# Altium PCB Omid Mazarei.PcbDoc (part 3 of 3)
Units mm, origin at the board's own origin, x right, y up, seen from the top; angles counter-clockwise.
Board outline 297 x 210 mm, 2 copper layers (Top Layer, Bottom Layer); 469 components, 0 nets, 938 pads, 2 vias.
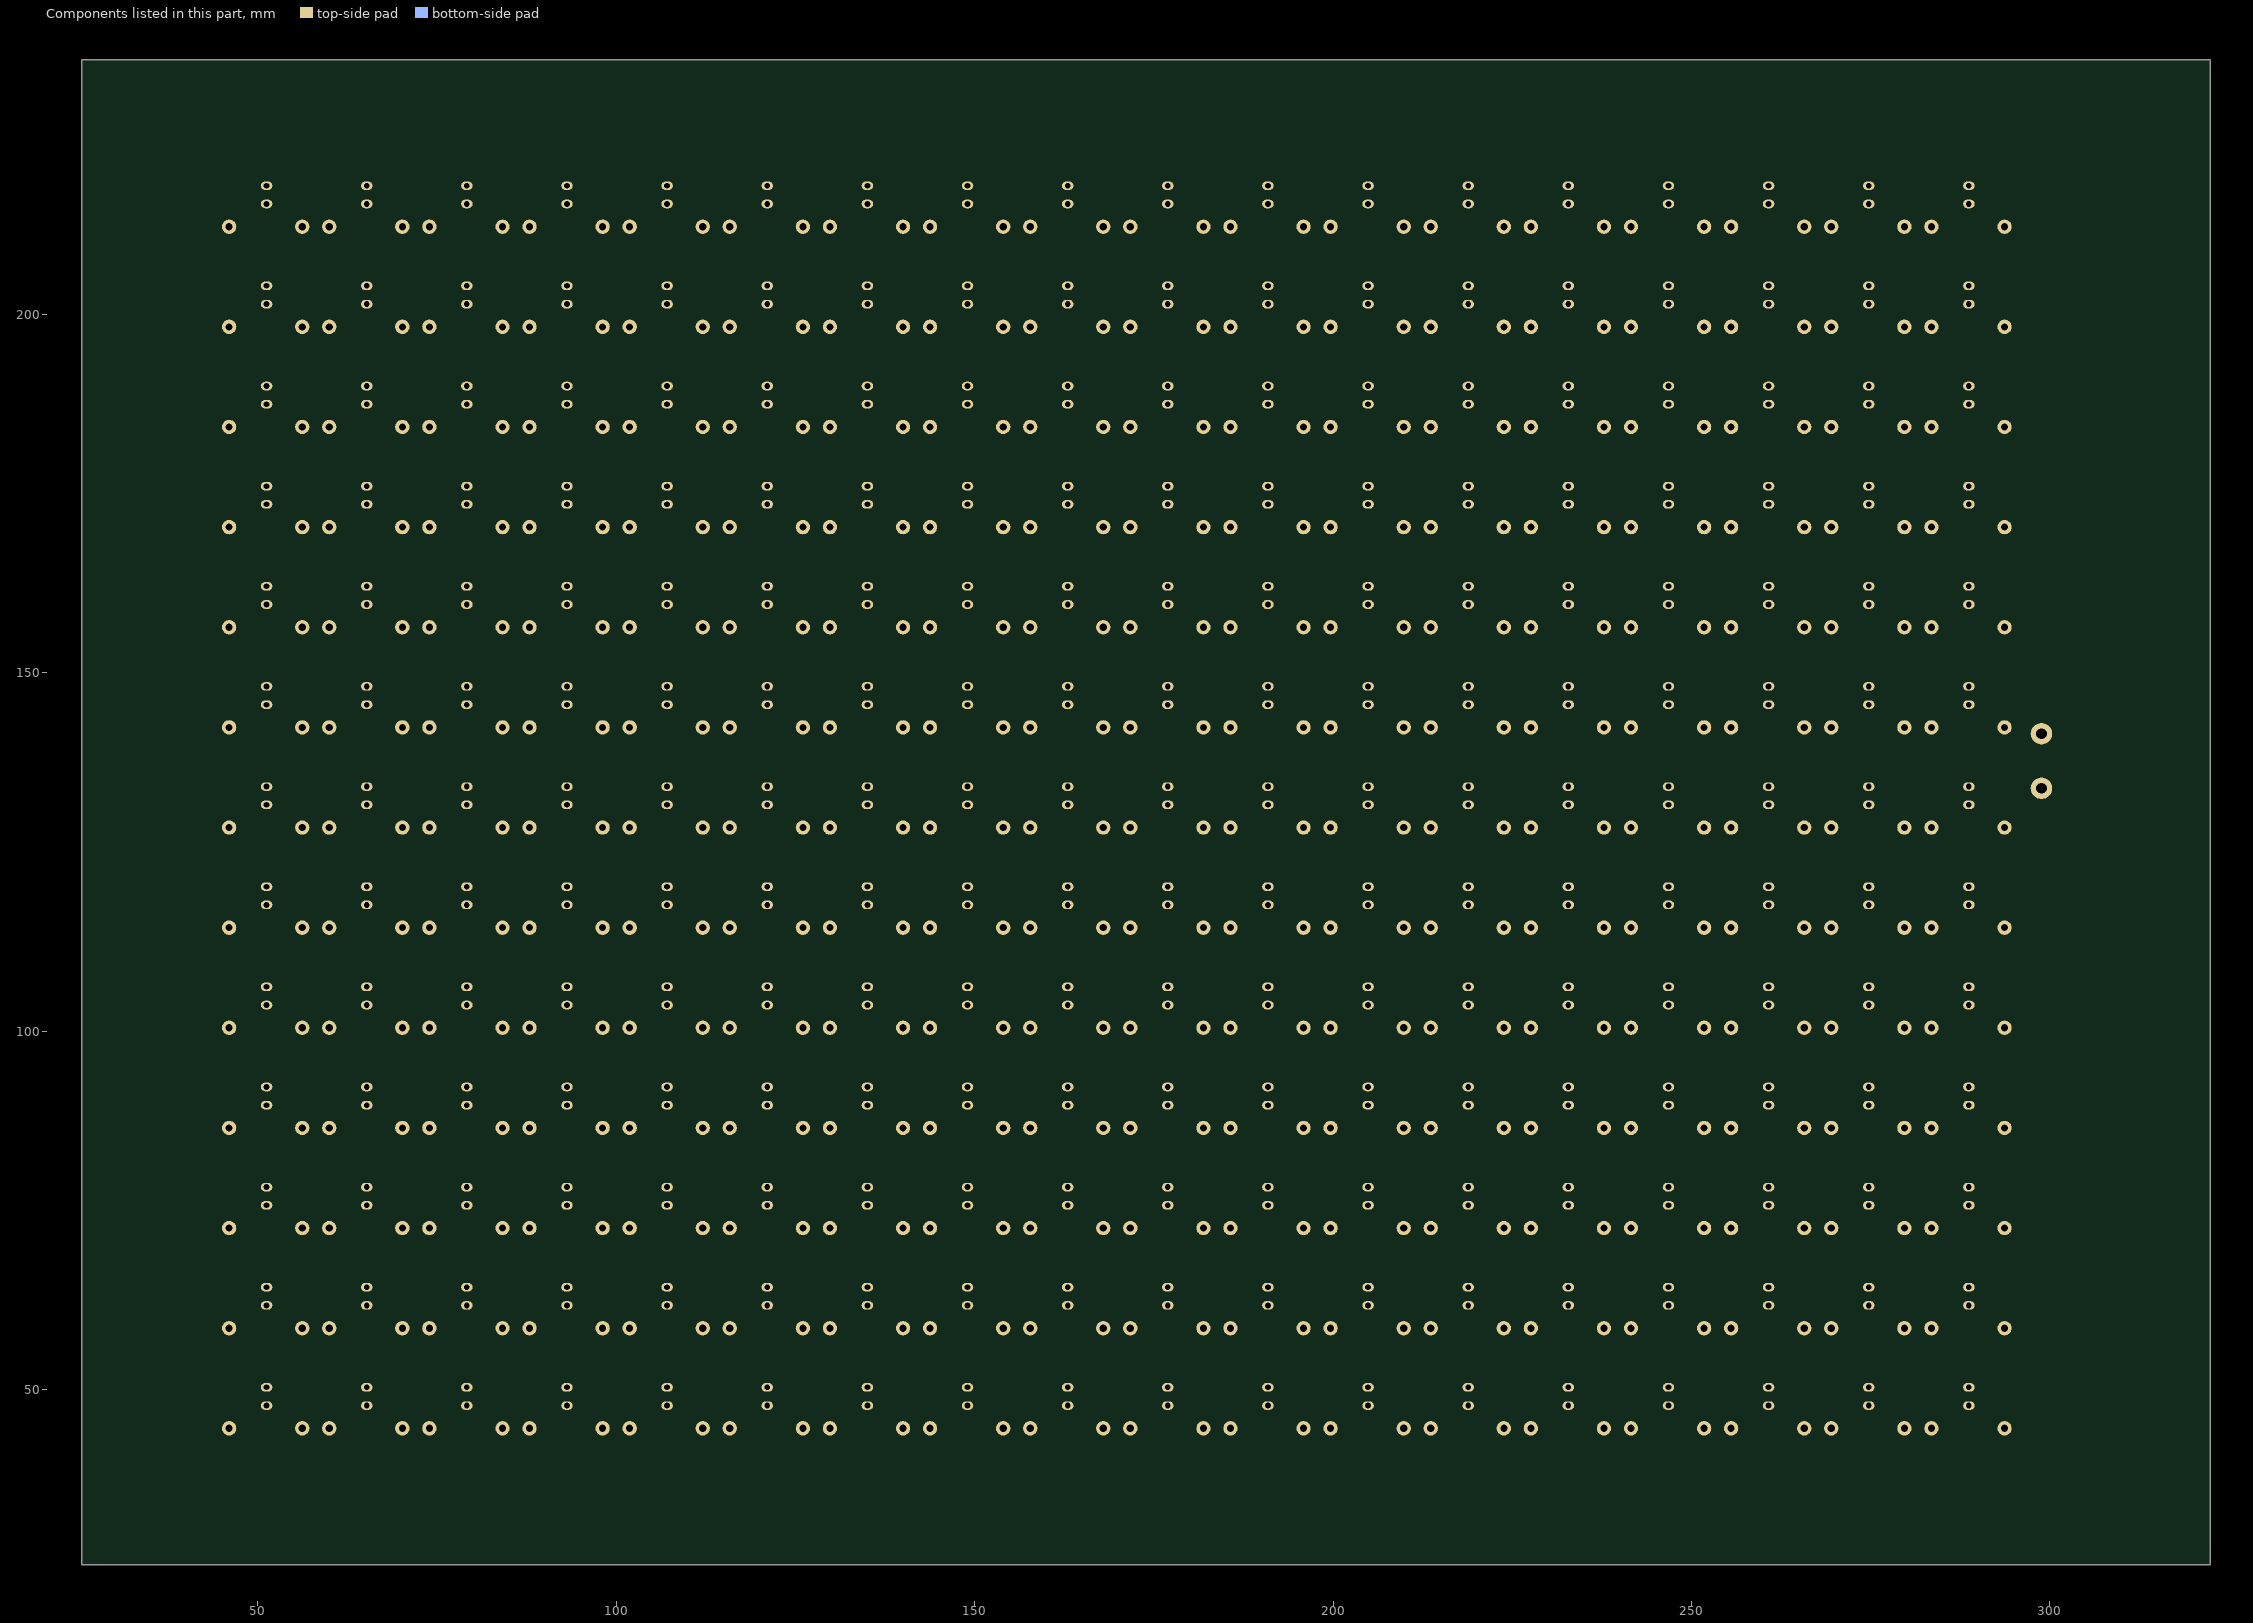
[diagram p3: the components of this part, seen from the top]

## Via types
v1: diameter 2, hole 1, Top Layer to Bottom Layer, 2 vias

## Nets (pads, with @x,y where several pads share a name; then routed paths per layer and width w, separated by ;. In a path a pad name is that pad's centre, name@x,y a point inside that pad or via, vN(x,y) a via of type N, cw(c..) or ccw(c..) an arc to the next point about the centre after c; other vN are vias at no path point) (continued)
copper on no net: (continued)
  Bottom Layer w0.8: 45.847,44.704 45.983,44.84 45.983,212.209 45.983,210.451 47.146,209.288 61.497,209.288 ; 45.983,44.569 45.983,42.811 47.146,41.648 61.497,41.648 ; 45.983,58.539 45.983,56.781 47.146,55.618 61.497,55.618 ; 45.983,72.509 45.983,70.751 47.146,69.588 61.497,69.588 ; 45.983,86.479 45.983,84.721 47.146,83.558 61.497,83.558 ; 45.983,100.449 45.983,98.691 47.146,97.528 61.497,97.528 ; 45.983,114.419 45.983,112.661 47.146,111.498 61.497,111.498 ; 45.983,128.389 45.983,126.631 47.146,125.468 61.497,125.468 ; 45.983,142.359 45.983,140.601 47.146,139.438 61.497,139.438 ; 45.983,156.329 45.983,154.571 47.146,153.408 61.497,153.408 ; 45.983,170.299 45.983,168.541 47.146,167.378 61.497,167.378 ; 45.983,184.269 45.983,182.511 47.146,181.348 61.497,181.348 ; 45.983,198.239 45.983,196.481 47.146,195.318 61.497,195.318 ; 51.21,47.744 54.385,47.744 54.766,47.363 56.183,45.946 56.183,44.569 ; 51.21,50.284 62.005,50.284 ; 51.21,61.714 54.385,61.714 54.766,61.333 56.183,59.916 56.183,58.539 ; 51.21,64.254 62.005,64.254 ; 51.21,75.684 54.385,75.684 54.766,75.303 56.183,73.886 56.183,72.509 ; 51.21,78.224 62.005,78.224 ; 51.21,89.654 54.385,89.654 54.766,89.273 56.183,87.856 56.183,86.479 ; 51.21,92.194 62.005,92.194 ; 51.21,103.624 54.385,103.624 54.766,103.243 56.183,101.826 56.183,100.449 ; 51.21,106.164 62.005,106.164 ; 51.21,117.594 54.385,117.594 54.766,117.213 56.183,115.796 56.183,114.419 ; 51.21,120.134 62.005,120.134 ; 51.21,131.564 54.385,131.564 54.766,131.183 56.183,129.766 56.183,128.389 ; 51.21,134.104 62.005,134.104 ; 51.21,145.534 54.385,145.534 54.766,145.153 56.183,143.736 56.183,142.359 ; 51.21,148.074 62.005,148.074 ; 51.21,159.504 54.385,159.504 54.766,159.123 56.183,157.706 56.183,156.329 ; 51.21,162.044 62.005,162.044 ; 51.21,173.474 54.385,173.474 54.766,173.093 56.183,171.676 56.183,170.299 ; 51.21,176.014 62.005,176.014 ; 51.21,187.444 54.385,187.444 54.766,187.063 56.183,185.646 56.183,184.269 ; 51.21,189.984 62.005,189.984 ; 51.21,201.414 54.385,201.414 54.766,201.033 56.183,199.616 56.183,198.239 ; 51.21,203.954 62.005,203.954 ; 51.21,215.384 54.385,215.384 54.766,215.003 56.183,213.586 56.183,212.209 ; 51.21,217.924 62.005,217.924 ; 59.953,44.569 59.953,42.811 61.116,41.648 75.467,41.648 ; 59.953,58.539 59.953,56.781 61.116,55.618 75.467,55.618 ; 59.953,72.509 59.953,70.751 61.116,69.588 75.467,69.588 ; 59.953,86.479 59.953,84.721 61.116,83.558 75.467,83.558 ; 59.953,100.449 59.953,98.691 61.116,97.528 75.467,97.528 ; 59.953,114.419 59.953,112.661 61.116,111.498 75.467,111.498 ; 59.953,128.389 59.953,126.631 61.116,125.468 75.467,125.468 ; 59.953,142.359 59.953,140.601 61.116,139.438 75.467,139.438 ; 59.953,156.329 59.953,154.571 61.116,153.408 75.467,153.408 ; 59.953,170.299 59.953,168.541 61.116,167.378 75.467,167.378 ; 59.953,184.269 59.953,182.511 61.116,181.348 75.467,181.348 ; 59.953,198.239 59.953,196.481 61.116,195.318 75.467,195.318 ; 59.953,212.209 59.953,210.451 61.116,209.288 75.467,209.288 ; 61.116,50.284 64.545,50.284 ; 61.116,64.254 64.545,64.254 ; 61.116,78.224 64.545,78.224 ; 61.116,92.194 64.545,92.194 ; 61.116,106.164 64.545,106.164 ; 61.116,120.134 64.545,120.134 ; 61.116,134.104 64.545,134.104 ; 61.116,148.074 64.545,148.074 ; 61.116,162.044 64.545,162.044 ; 61.116,176.014 64.545,176.014 ; 61.116,189.984 64.545,189.984 ; 61.116,203.954 64.545,203.954 ; 61.116,217.924 64.545,217.924 ; 65.18,47.744 68.355,47.744 68.736,47.363 70.153,45.946 70.153,44.569 ; 65.18,50.284 75.975,50.284 ; 65.18,61.714 68.355,61.714 68.736,61.333 70.153,59.916 70.153,58.539 ; 65.18,64.254 75.975,64.254 ; 65.18,75.684 68.355,75.684 68.736,75.303 70.153,73.886 70.153,72.509 ; 65.18,78.224 75.975,78.224 ; 65.18,89.654 68.355,89.654 68.736,89.273 70.153,87.856 70.153,86.479 ; 65.18,92.194 75.975,92.194 ; 65.18,103.624 68.355,103.624 68.736,103.243 70.153,101.826 70.153,100.449 ; 65.18,106.164 75.975,106.164 ; 65.18,117.594 68.355,117.594 68.736,117.213 70.153,115.796 70.153,114.419 ; 65.18,120.134 75.975,120.134 ; 65.18,131.564 68.355,131.564 68.736,131.183 70.153,129.766 70.153,128.389 ; 65.18,134.104 75.975,134.104 ; 65.18,145.534 68.355,145.534 68.736,145.153 70.153,143.736 70.153,142.359 ; 65.18,148.074 75.975,148.074 ; 65.18,159.504 68.355,159.504 68.736,159.123 70.153,157.706 70.153,156.329 ; 65.18,162.044 75.975,162.044 ; 65.18,173.474 68.355,173.474 68.736,173.093 70.153,171.676 70.153,170.299 ; 65.18,176.014 75.975,176.014 ; 65.18,187.444 68.355,187.444 68.736,187.063 70.153,185.646 70.153,184.269 ; 65.18,189.984 75.975,189.984 ; 65.18,201.414 68.355,201.414 68.736,201.033 70.153,199.616 70.153,198.239 ; 65.18,203.954 75.975,203.954 ; 65.18,215.384 68.355,215.384 68.736,215.003 70.153,213.586 70.153,212.209 ; 65.18,217.924 75.975,217.924 ; 73.923,44.569 73.923,42.811 75.086,41.648 89.437,41.648 ; 73.923,58.539 73.923,56.781 75.086,55.618 89.437,55.618 ; 73.923,72.509 73.923,70.751 75.086,69.588 89.437,69.588 ; 73.923,86.479 73.923,84.721 75.086,83.558 89.437,83.558 ; 73.923,100.449 73.923,98.691 75.086,97.528 89.437,97.528 ; 73.923,114.419 73.923,112.661 75.086,111.498 89.437,111.498 ; 73.923,128.389 73.923,126.631 75.086,125.468 89.437,125.468 ; 73.923,142.359 73.923,140.601 75.086,139.438 89.437,139.438 ; 73.923,156.329 73.923,154.571 75.086,153.408 89.437,153.408 ; 73.923,170.299 73.923,168.541 75.086,167.378 89.437,167.378 ; 73.923,184.269 73.923,182.511 75.086,181.348 89.437,181.348 ; 73.923,198.239 73.923,196.481 75.086,195.318 89.437,195.318 ; 73.923,212.209 73.923,210.451 75.086,209.288 89.437,209.288 ; 75.086,50.284 78.515,50.284 ; 75.086,64.254 78.515,64.254 ; 75.086,78.224 78.515,78.224 ; 75.086,92.194 78.515,92.194 ; 75.086,106.164 78.515,106.164 ; 75.086,120.134 78.515,120.134 ; 75.086,134.104 78.515,134.104 ; 75.086,148.074 78.515,148.074 ; 75.086,162.044 78.515,162.044 ; 75.086,176.014 78.515,176.014 ; 75.086,189.984 78.515,189.984 ; 75.086,203.954 78.515,203.954 ; 75.086,217.924 78.515,217.924 ; 79.15,47.744 82.325,47.744 82.706,47.363 84.123,45.946 84.123,44.569 ; 79.15,50.284 89.945,50.284 ; 79.15,61.714 82.325,61.714 82.706,61.333 84.123,59.916 84.123,58.539 ; 79.15,64.254 89.945,64.254 ; 79.15,75.684 82.325,75.684 82.706,75.303 84.123,73.886 84.123,72.509 ; 79.15,78.224 89.945,78.224 ; 79.15,89.654 82.325,89.654 82.706,89.273 84.123,87.856 84.123,86.479 ; 79.15,92.194 89.945,92.194 ; 79.15,103.624 82.325,103.624 82.706,103.243 84.123,101.826 84.123,100.449 ; 79.15,106.164 89.945,106.164 ; 79.15,117.594 82.325,117.594 82.706,117.213 84.123,115.796 84.123,114.419 ; 79.15,120.134 89.945,120.134 ; 79.15,131.564 82.325,131.564 82.706,131.183 84.123,129.766 84.123,128.389 ; 79.15,134.104 89.945,134.104 ; 79.15,145.534 82.325,145.534 82.706,145.153 84.123,143.736 84.123,142.359 ; 79.15,148.074 89.945,148.074 ; 79.15,159.504 82.325,159.504 82.706,159.123 84.123,157.706 84.123,156.329 ; 79.15,162.044 89.945,162.044 ; 79.15,173.474 82.325,173.474 82.706,173.093 84.123,171.676 84.123,170.299 ; 79.15,176.014 89.945,176.014 ; 79.15,187.444 82.325,187.444 82.706,187.063 84.123,185.646 84.123,184.269 ; 79.15,189.984 89.945,189.984 ; 79.15,201.414 82.325,201.414 82.706,201.033 84.123,199.616 84.123,198.239 ; 79.15,203.954 89.945,203.954 ; 79.15,215.384 82.325,215.384 82.706,215.003 84.123,213.586 84.123,212.209 ; 79.15,217.924 89.945,217.924 ; 87.893,44.569 87.893,42.811 89.056,41.648 103.407,41.648 ; 87.893,58.539 87.893,56.781 89.056,55.618 103.407,55.618 ; 87.893,72.509 87.893,70.751 89.056,69.588 103.407,69.588 ; 87.893,86.479 87.893,84.721 89.056,83.558 103.407,83.558 ; 87.893,100.449 87.893,98.691 89.056,97.528 103.407,97.528 ; 87.893,114.419 87.893,112.661 89.056,111.498 103.407,111.498 ; 87.893,128.389 87.893,126.631 89.056,125.468 103.407,125.468 ; 87.893,142.359 87.893,140.601 89.056,139.438 103.407,139.438 ; 87.893,156.329 87.893,154.571 89.056,153.408 103.407,153.408 ; 87.893,170.299 87.893,168.541 89.056,167.378 103.407,167.378 ; 87.893,184.269 87.893,182.511 89.056,181.348 103.407,181.348 ; 87.893,198.239 87.893,196.481 89.056,195.318 103.407,195.318 ; 87.893,212.209 87.893,210.451 89.056,209.288 103.407,209.288 ; 89.056,50.284 92.485,50.284 ; 89.056,64.254 92.485,64.254 ; 89.056,78.224 92.485,78.224 ; 89.056,92.194 92.485,92.194 ; 89.056,106.164 92.485,106.164 ; 89.056,120.134 92.485,120.134 ; 89.056,134.104 92.485,134.104 ; 89.056,148.074 92.485,148.074 ; 89.056,162.044 92.485,162.044 ; 89.056,176.014 92.485,176.014 ; 89.056,189.984 92.485,189.984 ; 89.056,203.954 92.485,203.954 ; 89.056,217.924 92.485,217.924 ; 93.12,47.744 96.295,47.744 96.676,47.363 98.093,45.946 98.093,44.569 ; 93.12,50.284 103.915,50.284 ; 93.12,61.714 96.295,61.714 96.676,61.333 98.093,59.916 98.093,58.539 ; 93.12,64.254 103.915,64.254 ; 93.12,75.684 96.295,75.684 96.676,75.303 98.093,73.886 98.093,72.509 ; 93.12,78.224 103.915,78.224 ; 93.12,89.654 96.295,89.654 96.676,89.273 98.093,87.856 98.093,86.479 ; 93.12,92.194 103.915,92.194 ; 93.12,103.624 96.295,103.624 96.676,103.243 98.093,101.826 98.093,100.449 ; 93.12,106.164 103.915,106.164 ; 93.12,117.594 96.295,117.594 96.676,117.213 98.093,115.796 98.093,114.419 ; 93.12,120.134 103.915,120.134 ; 93.12,131.564 96.295,131.564 96.676,131.183 98.093,129.766 98.093,128.389 ; 93.12,134.104 103.915,134.104 ; 93.12,145.534 96.295,145.534 96.676,145.153 98.093,143.736 98.093,142.359 ; 93.12,148.074 103.915,148.074 ; 93.12,159.504 96.295,159.504 96.676,159.123 98.093,157.706 98.093,156.329 ; 93.12,162.044 103.915,162.044 ; 93.12,173.474 96.295,173.474 96.676,173.093 98.093,171.676 98.093,170.299 ; 93.12,176.014 103.915,176.014 ; 93.12,187.444 96.295,187.444 96.676,187.063 98.093,185.646 98.093,184.269 ; 93.12,189.984 103.915,189.984 ; 93.12,201.414 96.295,201.414 96.676,201.033 98.093,199.616 98.093,198.239 ; 93.12,203.954 103.915,203.954 ; 93.12,215.384 96.295,215.384 96.676,215.003 98.093,213.586 98.093,212.209 ; 93.12,217.924 103.915,217.924 ; 101.863,44.569 101.863,42.811 103.026,41.648 117.377,41.648 ; 101.863,58.539 101.863,56.781 103.026,55.618 117.377,55.618 ; 101.863,72.509 101.863,70.751 103.026,69.588 117.377,69.588 ; 101.863,86.479 101.863,84.721 103.026,83.558 117.377,83.558 ; 101.863,100.449 101.863,98.691 103.026,97.528 117.377,97.528 ; 101.863,114.419 101.863,112.661 103.026,111.498 117.377,111.498 ; 101.863,128.389 101.863,126.631 103.026,125.468 117.377,125.468 ; 101.863,142.359 101.863,140.601 103.026,139.438 117.377,139.438 ; 101.863,156.329 101.863,154.571 103.026,153.408 117.377,153.408 ; 101.863,170.299 101.863,168.541 103.026,167.378 117.377,167.378 ; 101.863,184.269 101.863,182.511 103.026,181.348 117.377,181.348 ; 101.863,198.239 101.863,196.481 103.026,195.318 117.377,195.318 ; 101.863,212.209 101.863,210.451 103.026,209.288 117.377,209.288 ; 103.026,50.284 106.455,50.284 ; 103.026,64.254 106.455,64.254 ; 103.026,78.224 106.455,78.224 ; 103.026,92.194 106.455,92.194 ; 103.026,106.164 106.455,106.164 ; 103.026,120.134 106.455,120.134 ; 103.026,134.104 106.455,134.104 ; 103.026,148.074 106.455,148.074 ; 103.026,162.044 106.455,162.044 ; 103.026,176.014 106.455,176.014 ; 103.026,189.984 106.455,189.984 ; 103.026,203.954 106.455,203.954 ; 103.026,217.924 106.455,217.924 ; 107.09,47.744 110.265,47.744 110.646,47.363 112.063,45.946 112.063,44.569 ; 107.09,50.284 117.885,50.284 ; 107.09,61.714 110.265,61.714 110.646,61.333 112.063,59.916 112.063,58.539 ; 107.09,64.254 117.885,64.254 ; 107.09,75.684 110.265,75.684 110.646,75.303 112.063,73.886 112.063,72.509 ; 107.09,78.224 117.885,78.224 ; 107.09,89.654 110.265,89.654 110.646,89.273 112.063,87.856 112.063,86.479 ; 107.09,92.194 117.885,92.194 ; 107.09,103.624 110.265,103.624 110.646,103.243 112.063,101.826 112.063,100.449 ; 107.09,106.164 117.885,106.164 ; 107.09,117.594 110.265,117.594 110.646,117.213 112.063,115.796 112.063,114.419 ; 107.09,120.134 117.885,120.134 ; 107.09,131.564 110.265,131.564 110.646,131.183 112.063,129.766 112.063,128.389 ; 107.09,134.104 117.885,134.104 ; 107.09,145.534 110.265,145.534 110.646,145.153 112.063,143.736 112.063,142.359 ; 107.09,148.074 117.885,148.074 ; 107.09,159.504 110.265,159.504 110.646,159.123 112.063,157.706 112.063,156.329 ; 107.09,162.044 117.885,162.044 ; 107.09,173.474 110.265,173.474 110.646,173.093 112.063,171.676 112.063,170.299 ; 107.09,176.014 117.885,176.014 ; 107.09,187.444 110.265,187.444 110.646,187.063 112.063,185.646 112.063,184.269 ; 107.09,189.984 117.885,189.984 ; 107.09,201.414 110.265,201.414 110.646,201.033 112.063,199.616 112.063,198.239 ; 107.09,203.954 117.885,203.954 ; 107.09,215.384 110.265,215.384 110.646,215.003 112.063,213.586 112.063,212.209 ; 107.09,217.924 117.885,217.924 ; 115.833,44.569 115.833,42.811 116.996,41.648 131.347,41.648 ; 115.833,58.539 115.833,56.781 116.996,55.618 131.347,55.618 ; 115.833,72.509 115.833,70.751 116.996,69.588 131.347,69.588 ; 115.833,86.479 115.833,84.721 116.996,83.558 131.347,83.558 ; 115.833,100.449 115.833,98.691 116.996,97.528 131.347,97.528 ; 115.833,114.419 115.833,112.661 116.996,111.498 131.347,111.498 ; 115.833,128.389 115.833,126.631 116.996,125.468 131.347,125.468 ; 115.833,142.359 115.833,140.601 116.996,139.438 131.347,139.438 ; 115.833,156.329 115.833,154.571 116.996,153.408 131.347,153.408 ; 115.833,170.299 115.833,168.541 116.996,167.378 131.347,167.378 ; 115.833,184.269 115.833,182.511 116.996,181.348 131.347,181.348 ; 115.833,198.239 115.833,196.481 116.996,195.318 131.347,195.318 ; 115.833,212.209 115.833,210.451 116.996,209.288 131.347,209.288 ; 116.996,50.284 120.425,50.284 ; 116.996,64.254 120.425,64.254 ; 116.996,78.224 120.425,78.224 ; 116.996,92.194 120.425,92.194 ; 116.996,106.164 120.425,106.164 ; 116.996,120.134 120.425,120.134 ; 116.996,134.104 120.425,134.104 ; 116.996,148.074 120.425,148.074 ; 116.996,162.044 120.425,162.044 ; 116.996,176.014 120.425,176.014 ; 116.996,189.984 120.425,189.984 ; 116.996,203.954 120.425,203.954 ; 116.996,217.924 120.425,217.924 ; 121.06,47.744 124.235,47.744 124.616,47.363 126.033,45.946 126.033,44.569 ; 121.06,50.284 131.855,50.284 ; 121.06,61.714 124.235,61.714 124.616,61.333 126.033,59.916 126.033,58.539 ; 121.06,64.254 131.855,64.254 ; 121.06,75.684 124.235,75.684 124.616,75.303 126.033,73.886 126.033,72.509 ; 121.06,78.224 131.855,78.224 ; 121.06,89.654 124.235,89.654 124.616,89.273 126.033,87.856 126.033,86.479 ; 121.06,92.194 131.855,92.194 ; 121.06,103.624 124.235,103.624 124.616,103.243 126.033,101.826 126.033,100.449 ; 121.06,106.164 131.855,106.164 ; 121.06,117.594 124.235,117.594 124.616,117.213 126.033,115.796 126.033,114.419 ; 121.06,120.134 131.855,120.134 ; 121.06,131.564 124.235,131.564 124.616,131.183 126.033,129.766 126.033,128.389 ; 121.06,134.104 131.855,134.104 ; 121.06,145.534 124.235,145.534 124.616,145.153 126.033,143.736 126.033,142.359 ; 121.06,148.074 131.855,148.074 ; 121.06,159.504 124.235,159.504 124.616,159.123 126.033,157.706 126.033,156.329 ; 121.06,162.044 131.855,162.044 ; 121.06,173.474 124.235,173.474 124.616,173.093 126.033,171.676 126.033,170.299 ; 121.06,176.014 131.855,176.014 ; 121.06,187.444 124.235,187.444 124.616,187.063 126.033,185.646 126.033,184.269 ; 121.06,189.984 131.855,189.984 ; 121.06,201.414 124.235,201.414 124.616,201.033 126.033,199.616 126.033,198.239 ; 121.06,203.954 131.855,203.954 ; 121.06,215.384 124.235,215.384 124.616,215.003 126.033,213.586 126.033,212.209 ; 121.06,217.924 131.855,217.924 ; 129.803,44.569 129.803,42.811 130.966,41.648 145.317,41.648 ; 129.803,58.539 129.803,56.781 130.966,55.618 145.317,55.618 ; 129.803,72.509 129.803,70.751 130.966,69.588 145.317,69.588 ; 129.803,86.479 129.803,84.721 130.966,83.558 145.317,83.558 ; 129.803,100.449 129.803,98.691 130.966,97.528 145.317,97.528 ; 129.803,114.419 129.803,112.661 130.966,111.498 145.317,111.498 ; 129.803,128.389 129.803,126.631 130.966,125.468 145.317,125.468 ; 129.803,142.359 129.803,140.601 130.966,139.438 145.317,139.438 ; 129.803,156.329 129.803,154.571 130.966,153.408 145.317,153.408 ; 129.803,170.299 129.803,168.541 130.966,167.378 145.317,167.378 ; 129.803,184.269 129.803,182.511 130.966,181.348 145.317,181.348 ; 129.803,198.239 129.803,196.481 130.966,195.318 145.317,195.318 ; 129.803,212.209 129.803,210.451 130.966,209.288 145.317,209.288 ; 130.966,50.284 134.395,50.284 ; 130.966,64.254 134.395,64.254 ; 130.966,78.224 134.395,78.224 ; 130.966,92.194 134.395,92.194 ; 130.966,106.164 134.395,106.164 ; 130.966,120.134 134.395,120.134 ; 130.966,134.104 134.395,134.104 ; 130.966,148.074 134.395,148.074 ; 130.966,162.044 134.395,162.044 ; 130.966,176.014 134.395,176.014 ; 130.966,189.984 134.395,189.984 ; 130.966,203.954 134.395,203.954 ; 130.966,217.924 134.395,217.924 ; 135.03,47.744 138.205,47.744 138.586,47.363 140.003,45.946 140.003,44.569 ; 135.03,50.284 145.825,50.284 ; 135.03,61.714 138.205,61.714 138.586,61.333 140.003,59.916 140.003,58.539 ; 135.03,64.254 145.825,64.254 ; 135.03,75.684 138.205,75.684 138.586,75.303 140.003,73.886 140.003,72.509 ; 135.03,78.224 145.825,78.224 ; 135.03,89.654 138.205,89.654 138.586,89.273 140.003,87.856 140.003,86.479 ; 135.03,92.194 145.825,92.194 ; 135.03,103.624 138.205,103.624 138.586,103.243 140.003,101.826 140.003,100.449 ; 135.03,106.164 145.825,106.164 ; 135.03,117.594 138.205,117.594 138.586,117.213 140.003,115.796 140.003,114.419 ; 135.03,120.134 145.825,120.134 ; 135.03,131.564 138.205,131.564 138.586,131.183 140.003,129.766 140.003,128.389 ; 135.03,134.104 145.825,134.104 ; 135.03,145.534 138.205,145.534 138.586,145.153 140.003,143.736 140.003,142.359 ; 135.03,148.074 145.825,148.074 ; 135.03,159.504 138.205,159.504 138.586,159.123 140.003,157.706 140.003,156.329 ; 135.03,162.044 145.825,162.044 ; 135.03,173.474 138.205,173.474 138.586,173.093 140.003,171.676 140.003,170.299 ; 135.03,176.014 145.825,176.014 ; 135.03,187.444 138.205,187.444 138.586,187.063 140.003,185.646 140.003,184.269 ; 135.03,189.984 145.825,189.984 ; 135.03,201.414 138.205,201.414 138.586,201.033 140.003,199.616 140.003,198.239 ; 135.03,203.954 145.825,203.954 ; 135.03,215.384 138.205,215.384 138.586,215.003 140.003,213.586 140.003,212.209 ; 135.03,217.924 145.825,217.924 ; 143.773,44.569 143.773,42.811 144.936,41.648 159.287,41.648 ; 143.773,58.539 143.773,56.781 144.936,55.618 159.287,55.618 ; 143.773,72.509 143.773,70.751 144.936,69.588 159.287,69.588 ; 143.773,86.479 143.773,84.721 144.936,83.558 159.287,83.558 ; 143.773,100.449 143.773,98.691 144.936,97.528 159.287,97.528 ; 143.773,114.419 143.773,112.661 144.936,111.498 159.287,111.498 ; 143.773,128.389 143.773,126.631 144.936,125.468 159.287,125.468 ; 143.773,142.359 143.773,140.601 144.936,139.438 159.287,139.438 ; 143.773,156.329 143.773,154.571 144.936,153.408 159.287,153.408 ; 143.773,170.299 143.773,168.541 144.936,167.378 159.287,167.378 ; 143.773,184.269 143.773,182.511 144.936,181.348 159.287,181.348 ; 143.773,198.239 143.773,196.481 144.936,195.318 159.287,195.318 ; 143.773,212.209 143.773,210.451 144.936,209.288 159.287,209.288 ; 144.936,50.284 148.365,50.284 ; 144.936,64.254 148.365,64.254 ; 144.936,78.224 148.365,78.224 ; 144.936,92.194 148.365,92.194 ; 144.936,106.164 148.365,106.164 ; 144.936,120.134 148.365,120.134 ; 144.936,134.104 148.365,134.104 ; 144.936,148.074 148.365,148.074 ; 144.936,162.044 148.365,162.044 ; 144.936,176.014 148.365,176.014 ; 144.936,189.984 148.365,189.984 ; 144.936,203.954 148.365,203.954 ; 144.936,217.924 148.365,217.924 ; 149,47.744 152.175,47.744 152.556,47.363 153.973,45.946 153.973,44.569 ; 149,50.284 159.795,50.284 ; 149,61.714 152.175,61.714 152.556,61.333 153.973,59.916 153.973,58.539 ; 149,64.254 159.795,64.254 ; 149,75.684 152.175,75.684 152.556,75.303 153.973,73.886 153.973,72.509 ; 149,78.224 159.795,78.224 ; 149,89.654 152.175,89.654 152.556,89.273 153.973,87.856 153.973,86.479 ; 149,92.194 159.795,92.194 ; 149,103.624 152.175,103.624 152.556,103.243 153.973,101.826 153.973,100.449 ; 149,106.164 159.795,106.164 ; 149,117.594 152.175,117.594 152.556,117.213 153.973,115.796 153.973,114.419 ; 149,120.134 159.795,120.134 ; 149,131.564 152.175,131.564 152.556,131.183 153.973,129.766 153.973,128.389 ; 149,134.104 159.795,134.104 ; 149,145.534 152.175,145.534 152.556,145.153 153.973,143.736 153.973,142.359 ; 149,148.074 159.795,148.074 ; 149,159.504 152.175,159.504 152.556,159.123 153.973,157.706 153.973,156.329 ; 149,162.044 159.795,162.044 ; 149,173.474 152.175,173.474 152.556,173.093 153.973,171.676 153.973,170.299 ; 149,176.014 159.795,176.014 ; 149,187.444 152.175,187.444 152.556,187.063 153.973,185.646 153.973,184.269 ; 149,189.984 159.795,189.984 ; 149,201.414 152.175,201.414 152.556,201.033 153.973,199.616 153.973,198.239 ; 149,203.954 159.795,203.954 ; 149,215.384 152.175,215.384 152.556,215.003 153.973,213.586 153.973,212.209 ; 149,217.924 159.795,217.924 ; 157.743,44.569 157.743,42.811 158.906,41.648 173.257,41.648 ; 157.743,58.539 157.743,56.781 158.906,55.618 173.257,55.618 ; 157.743,72.509 157.743,70.751 158.906,69.588 173.257,69.588 ; 157.743,86.479 157.743,84.721 158.906,83.558 173.257,83.558 ; 157.743,100.449 157.743,98.691 158.906,97.528 173.257,97.528 ; 157.743,114.419 157.743,112.661 158.906,111.498 173.257,111.498 ; 157.743,128.389 157.743,126.631 158.906,125.468 173.257,125.468 ; 157.743,142.359 157.743,140.601 158.906,139.438 173.257,139.438 ; 157.743,156.329 157.743,154.571 158.906,153.408 173.257,153.408 ; 157.743,170.299 157.743,168.541 158.906,167.378 173.257,167.378 ; 157.743,184.269 157.743,182.511 158.906,181.348 173.257,181.348 ; 157.743,198.239 157.743,196.481 158.906,195.318 173.257,195.318 ; 157.743,212.209 157.743,210.451 158.906,209.288 173.257,209.288 ; 158.906,50.284 162.335,50.284 ; 158.906,64.254 162.335,64.254 ; 158.906,78.224 162.335,78.224 ; 158.906,92.194 162.335,92.194 ; 158.906,106.164 162.335,106.164 ; 158.906,120.134 162.335,120.134 ; 158.906,134.104 162.335,134.104 ; 158.906,148.074 162.335,148.074 ; 158.906,162.044 162.335,162.044 ; 158.906,176.014 162.335,176.014 ; 158.906,189.984 162.335,189.984 ; 158.906,203.954 162.335,203.954 ; 158.906,217.924 162.335,217.924 ; 162.97,47.744 166.145,47.744 166.526,47.363 167.943,45.946 167.943,44.569 ; 162.97,50.284 173.765,50.284 ; 162.97,61.714 166.145,61.714 166.526,61.333 167.943,59.916 167.943,58.539 ; 162.97,64.254 173.765,64.254 ; 162.97,75.684 166.145,75.684 166.526,75.303 167.943,73.886 167.943,72.509 ; 162.97,78.224 173.765,78.224 ; 162.97,89.654 166.145,89.654 166.526,89.273 167.943,87.856 167.943,86.479 ; 162.97,92.194 173.765,92.194 ; 162.97,103.624 166.145,103.624 166.526,103.243 167.943,101.826 167.943,100.449 ; 162.97,106.164 173.765,106.164 ; 162.97,117.594 166.145,117.594 166.526,117.213 167.943,115.796 167.943,114.419 ; 162.97,120.134 173.765,120.134 ; 162.97,131.564 166.145,131.564 166.526,131.183 167.943,129.766 167.943,128.389 ; 162.97,134.104 173.765,134.104 ; 162.97,145.534 166.145,145.534 166.526,145.153 167.943,143.736 167.943,142.359 ; 162.97,148.074 173.765,148.074 ; 162.97,159.504 166.145,159.504 166.526,159.123 167.943,157.706 167.943,156.329 ; 162.97,162.044 173.765,162.044 ; 162.97,173.474 166.145,173.474 166.526,173.093 167.943,171.676 167.943,170.299 ; 162.97,176.014 173.765,176.014 ; 162.97,187.444 166.145,187.444 166.526,187.063 167.943,185.646 167.943,184.269 ; 162.97,189.984 173.765,189.984 ; 162.97,201.414 166.145,201.414 166.526,201.033 167.943,199.616 167.943,198.239 ; 162.97,203.954 173.765,203.954 ; 162.97,215.384 166.145,215.384 166.526,215.003 167.943,213.586 167.943,212.209 ; 162.97,217.924 173.765,217.924 ; 171.713,44.569 171.713,42.811 172.876,41.648 187.227,41.648 ; 171.713,58.539 171.713,56.781 172.876,55.618 187.227,55.618 ; 171.713,72.509 171.713,70.751 172.876,69.588 187.227,69.588 ; 171.713,86.479 171.713,84.721 172.876,83.558 187.227,83.558 ; 171.713,100.449 171.713,98.691 172.876,97.528 187.227,97.528 ; 171.713,114.419 171.713,112.661 172.876,111.498 187.227,111.498 ; 171.713,128.389 171.713,126.631 172.876,125.468 187.227,125.468 ; 171.713,142.359 171.713,140.601 172.876,139.438 187.227,139.438 ; 171.713,156.329 171.713,154.571 172.876,153.408 187.227,153.408 ; 171.713,170.299 171.713,168.541 172.876,167.378 187.227,167.378 ; 171.713,184.269 171.713,182.511 172.876,181.348 187.227,181.348 ; 171.713,198.239 171.713,196.481 172.876,195.318 187.227,195.318 ; 171.713,212.209 171.713,210.451 172.876,209.288 187.227,209.288 ; 172.876,50.284 176.305,50.284 ; 172.876,64.254 176.305,64.254 ; 172.876,78.224 176.305,78.224 ; 172.876,92.194 176.305,92.194 ; 172.876,106.164 176.305,106.164 ; 172.876,120.134 176.305,120.134 ; 172.876,134.104 176.305,134.104 ; 172.876,148.074 176.305,148.074 ; 172.876,162.044 176.305,162.044 ; 172.876,176.014 176.305,176.014 ; 172.876,189.984 176.305,189.984 ; 172.876,203.954 176.305,203.954 ; 172.876,217.924 176.305,217.924 ; 176.94,47.744 180.115,47.744 180.496,47.363 181.913,45.946 181.913,44.569 ; 176.94,50.284 187.735,50.284 ; 176.94,61.714 180.115,61.714 180.496,61.333 181.913,59.916 181.913,58.539 ; 176.94,64.254 187.735,64.254 ; 176.94,75.684 180.115,75.684 180.496,75.303 181.913,73.886 181.913,72.509 ; 176.94,78.224 187.735,78.224 ; 176.94,89.654 180.115,89.654 180.496,89.273 181.913,87.856 181.913,86.479 ; 176.94,92.194 187.735,92.194 ; 176.94,103.624 180.115,103.624 180.496,103.243 181.913,101.826 181.913,100.449 ; 176.94,106.164 187.735,106.164 ; 176.94,117.594 180.115,117.594 180.496,117.213 181.913,115.796 181.913,114.419 ; 176.94,120.134 187.735,120.134 ; 176.94,131.564 180.115,131.564 180.496,131.183 181.913,129.766 181.913,128.389 ; 176.94,134.104 187.735,134.104 ; 176.94,145.534 180.115,145.534 180.496,145.153 181.913,143.736 181.913,142.359 ; 176.94,148.074 187.735,148.074 ; 176.94,159.504 180.115,159.504 180.496,159.123 181.913,157.706 181.913,156.329 ; 176.94,162.044 187.735,162.044 ; 176.94,173.474 180.115,173.474 180.496,173.093 181.913,171.676 181.913,170.299 ; 176.94,176.014 187.735,176.014 ; 176.94,187.444 180.115,187.444 180.496,187.063 181.913,185.646 181.913,184.269 ; 176.94,189.984 187.735,189.984 ; 176.94,201.414 180.115,201.414 180.496,201.033 181.913,199.616 181.913,198.239 ; 176.94,203.954 187.735,203.954 ; 176.94,215.384 180.115,215.384 180.496,215.003 181.913,213.586 181.913,212.209 ; 176.94,217.924 187.735,217.924 ; 185.683,44.569 185.683,42.811 186.846,41.648 201.197,41.648 ; 185.683,58.539 185.683,56.781 186.846,55.618 201.197,55.618 ; 185.683,72.509 185.683,70.751 186.846,69.588 201.197,69.588 ; 185.683,86.479 185.683,84.721 186.846,83.558 201.197,83.558 ; 185.683,100.449 185.683,98.691 186.846,97.528 201.197,97.528 ; 185.683,114.419 185.683,112.661 186.846,111.498 201.197,111.498 ; 185.683,128.389 185.683,126.631 186.846,125.468 201.197,125.468 ; 185.683,142.359 185.683,140.601 186.846,139.438 201.197,139.438 ; 185.683,156.329 185.683,154.571 186.846,153.408 201.197,153.408 ; 185.683,170.299 185.683,168.541 186.846,167.378 201.197,167.378 ; 185.683,184.269 185.683,182.511 186.846,181.348 201.197,181.348 ; 185.683,198.239 185.683,196.481 186.846,195.318 201.197,195.318 ; 185.683,212.209 185.683,210.451 186.846,209.288 201.197,209.288 ; 186.846,50.284 190.275,50.284 ; 186.846,64.254 190.275,64.254 ; 186.846,78.224 190.275,78.224 ; 186.846,92.194 190.275,92.194 ; 186.846,106.164 190.275,106.164 ; 186.846,120.134 190.275,120.134 ; 186.846,134.104 190.275,134.104 ; 186.846,148.074 190.275,148.074 ; 186.846,162.044 190.275,162.044 ; 186.846,176.014 190.275,176.014 ; 186.846,189.984 190.275,189.984 ; 186.846,203.954 190.275,203.954 ; 186.846,217.924 190.275,217.924 ; 190.91,47.744 194.085,47.744 194.466,47.363 195.883,45.946 195.883,44.569 ; 190.91,50.284 201.705,50.284 ; 190.91,61.714 194.085,61.714 194.466,61.333 195.883,59.916 195.883,58.539 ; 190.91,64.254 201.705,64.254 ; 190.91,75.684 194.085,75.684 194.466,75.303 195.883,73.886 195.883,72.509 ; 190.91,78.224 201.705,78.224 ; 190.91,89.654 194.085,89.654 194.466,89.273 195.883,87.856 195.883,86.479 ; 190.91,92.194 201.705,92.194 ; 190.91,103.624 194.085,103.624 194.466,103.243 195.883,101.826 195.883,100.449 ; 190.91,106.164 201.705,106.164 ; 190.91,117.594 194.085,117.594 194.466,117.213 195.883,115.796 195.883,114.419 ; 190.91,120.134 201.705,120.134 ; 190.91,131.564 194.085,131.564 194.466,131.183 195.883,129.766 195.883,128.389 ; 190.91,134.104 201.705,134.104 ; 190.91,145.534 194.085,145.534 194.466,145.153 195.883,143.736 195.883,142.359 ; 190.91,148.074 201.705,148.074 ; 190.91,159.504 194.085,159.504 194.466,159.123 195.883,157.706 195.883,156.329 ; 190.91,162.044 201.705,162.044 ; 190.91,173.474 194.085,173.474 194.466,173.093 195.883,171.676 195.883,170.299 ; 190.91,176.014 201.705,176.014 ; 190.91,187.444 194.085,187.444 194.466,187.063 195.883,185.646 195.883,184.269 ; 190.91,189.984 201.705,189.984 ; 190.91,201.414 194.085,201.414 194.466,201.033 195.883,199.616 195.883,198.239 ; 190.91,203.954 201.705,203.954 ; 190.91,215.384 194.085,215.384 194.466,215.003 195.883,213.586 195.883,212.209 ; 190.91,217.924 201.705,217.924 ; 199.653,44.569 199.653,42.811 200.816,41.648 215.167,41.648 ; 199.653,58.539 199.653,56.781 200.816,55.618 215.167,55.618 ; 199.653,72.509 199.653,70.751 200.816,69.588 215.167,69.588 ; 199.653,86.479 199.653,84.721 200.816,83.558 215.167,83.558 ; 199.653,100.449 199.653,98.691 200.816,97.528 215.167,97.528 ; 199.653,114.419 199.653,112.661 200.816,111.498 215.167,111.498 ; 199.653,128.389 199.653,126.631 200.816,125.468 215.167,125.468 ; 199.653,142.359 199.653,140.601 200.816,139.438 215.167,139.438 ; 199.653,156.329 199.653,154.571 200.816,153.408 215.167,153.408 ; 199.653,170.299 199.653,168.541 200.816,167.378 215.167,167.378 ; 199.653,184.269 199.653,182.511 200.816,181.348 215.167,181.348 ; 199.653,198.239 199.653,196.481 200.816,195.318 215.167,195.318 ; 199.653,212.209 199.653,210.451 200.816,209.288 215.167,209.288 ; 200.816,50.284 204.245,50.284 ; 200.816,64.254 204.245,64.254 ; 200.816,78.224 204.245,78.224 ; 200.816,92.194 204.245,92.194 ; 200.816,106.164 204.245,106.164 ; 200.816,120.134 204.245,120.134 ; 200.816,134.104 204.245,134.104 ; 200.816,148.074 204.245,148.074 ; 200.816,162.044 204.245,162.044 ; 200.816,176.014 204.245,176.014 ; 200.816,189.984 204.245,189.984 ; 200.816,203.954 204.245,203.954 ; 200.816,217.924 204.245,217.924 ; 204.88,47.744 208.055,47.744 208.436,47.363 209.853,45.946 209.853,44.569 ; 204.88,50.284 215.675,50.284 ; 204.88,61.714 208.055,61.714 208.436,61.333 209.853,59.916 209.853,58.539 ; 204.88,64.254 215.675,64.254 ; 204.88,75.684 208.055,75.684 208.436,75.303 209.853,73.886 209.853,72.509 ; 204.88,78.224 215.675,78.224 ; 204.88,89.654 208.055,89.654 208.436,89.273 209.853,87.856 209.853,86.479 ; 204.88,92.194 215.675,92.194 ; 204.88,103.624 208.055,103.624 208.436,103.243 209.853,101.826 209.853,100.449 ; 204.88,106.164 215.675,106.164 ; 204.88,117.594 208.055,117.594 208.436,117.213 209.853,115.796 209.853,114.419 ; 204.88,120.134 215.675,120.134 ; 204.88,131.564 208.055,131.564 208.436,131.183 209.853,129.766 209.853,128.389 ; 204.88,134.104 215.675,134.104 ; 204.88,145.534 208.055,145.534 208.436,145.153 209.853,143.736 209.853,142.359 ; 204.88,148.074 215.675,148.074 ; 204.88,159.504 208.055,159.504 208.436,159.123 209.853,157.706 209.853,156.329 ; 204.88,162.044 215.675,162.044 ; 204.88,173.474 208.055,173.474 208.436,173.093 209.853,171.676 209.853,170.299 ; 204.88,176.014 215.675,176.014 ; 204.88,187.444 208.055,187.444 208.436,187.063 209.853,185.646 209.853,184.269 ; 204.88,189.984 215.675,189.984 ; 204.88,201.414 208.055,201.414 208.436,201.033 209.853,199.616 209.853,198.239 ; 204.88,203.954 215.675,203.954 ; 204.88,215.384 208.055,215.384 208.436,215.003 209.853,213.586 209.853,212.209 ; 204.88,217.924 215.675,217.924 ; 213.623,44.569 213.623,42.811 214.786,41.648 229.137,41.648 ; 213.623,58.539 213.623,56.781 214.786,55.618 229.137,55.618 ; 213.623,72.509 213.623,70.751 214.786,69.588 229.137,69.588 ; 213.623,86.479 213.623,84.721 214.786,83.558 229.137,83.558 ; 213.623,100.449 213.623,98.691 214.786,97.528 229.137,97.528 ; 213.623,114.419 213.623,112.661 214.786,111.498 229.137,111.498 ; 213.623,128.389 213.623,126.631 214.786,125.468 229.137,125.468 ; 213.623,142.359 213.623,140.601 214.786,139.438 229.137,139.438 ; 213.623,156.329 213.623,154.571 214.786,153.408 229.137,153.408 ; 213.623,170.299 213.623,168.541 214.786,167.378 229.137,167.378 ; 213.623,184.269 213.623,182.511 214.786,181.348 229.137,181.348 ; 213.623,198.239 213.623,196.481 214.786,195.318 229.137,195.318 ; 213.623,212.209 213.623,210.451 214.786,209.288 229.137,209.288 ; 214.786,50.284 218.215,50.284 ; 214.786,64.254 218.215,64.254 ; 214.786,78.224 218.215,78.224 ; 214.786,92.194 218.215,92.194 ; 214.786,106.164 218.215,106.164 ; 214.786,120.134 218.215,120.134 ; 214.786,134.104 218.215,134.104 ; 214.786,148.074 218.215,148.074 ; 214.786,162.044 218.215,162.044 ; 214.786,176.014 218.215,176.014 ; 214.786,189.984 218.215,189.984 ; 214.786,203.954 218.215,203.954 ; 214.786,217.924 218.215,217.924 ; 218.85,47.744 222.025,47.744 222.406,47.363 223.823,45.946 223.823,44.569 ; 218.85,50.284 229.645,50.284 ; 218.85,61.714 222.025,61.714 222.406,61.333 223.823,59.916 223.823,58.539 ; 218.85,64.254 229.645,64.254 ; 218.85,75.684 222.025,75.684 222.406,75.303 223.823,73.886 223.823,72.509 ; 218.85,78.224 229.645,78.224 ; 218.85,89.654 222.025,89.654 222.406,89.273 223.823,87.856 223.823,86.479 ; 218.85,92.194 229.645,92.194 ; 218.85,103.624 222.025,103.624 222.406,103.243 223.823,101.826 223.823,100.449 ; 218.85,106.164 229.645,106.164 ; 218.85,117.594 222.025,117.594 222.406,117.213 223.823,115.796 223.823,114.419 ; 218.85,120.134 229.645,120.134 ; 218.85,131.564 222.025,131.564 222.406,131.183 223.823,129.766 223.823,128.389 ; 218.85,134.104 229.645,134.104 ; 218.85,145.534 222.025,145.534 222.406,145.153 223.823,143.736 223.823,142.359 ; 218.85,148.074 229.645,148.074 ; 218.85,159.504 222.025,159.504 222.406,159.123 223.823,157.706 223.823,156.329 ; 218.85,162.044 229.645,162.044 ; 218.85,173.474 222.025,173.474 222.406,173.093 223.823,171.676 223.823,170.299 ; 218.85,176.014 229.645,176.014 ; 218.85,187.444 222.025,187.444 222.406,187.063 223.823,185.646 223.823,184.269 ; 218.85,189.984 229.645,189.984 ; 218.85,201.414 222.025,201.414 222.406,201.033 223.823,199.616 223.823,198.239 ; 218.85,203.954 229.645,203.954 ; 218.85,215.384 222.025,215.384 222.406,215.003 223.823,213.586 223.823,212.209 ; 218.85,217.924 229.645,217.924 ; 227.593,44.569 227.593,42.811 228.756,41.648 243.107,41.648 ; 227.593,58.539 227.593,56.781 228.756,55.618 243.107,55.618 ; 227.593,72.509 227.593,70.751 228.756,69.588 243.107,69.588 ; 227.593,86.479 227.593,84.721 228.756,83.558 243.107,83.558 ; 227.593,100.449 227.593,98.691 228.756,97.528 243.107,97.528 ; 227.593,114.419 227.593,112.661 228.756,111.498 243.107,111.498 ; 227.593,128.389 227.593,126.631 228.756,125.468 243.107,125.468 ; 227.593,142.359 227.593,140.601 228.756,139.438 243.107,139.438 ; 227.593,156.329 227.593,154.571 228.756,153.408 243.107,153.408 ; 227.593,170.299 227.593,168.541 228.756,167.378 243.107,167.378 ; 227.593,184.269 227.593,182.511 228.756,181.348 243.107,181.348 ; 227.593,198.239 227.593,196.481 228.756,195.318 243.107,195.318 ; 227.593,212.209 227.593,210.451 228.756,209.288 243.107,209.288 ; 228.756,50.284 232.185,50.284 ; 228.756,64.254 232.185,64.254 ; 228.756,78.224 232.185,78.224 ; 228.756,92.194 232.185,92.194 ; 228.756,106.164 232.185,106.164 ; 228.756,120.134 232.185,120.134 ; 228.756,134.104 232.185,134.104 ; 228.756,148.074 232.185,148.074 ; 228.756,162.044 232.185,162.044 ; 228.756,176.014 232.185,176.014 ; 228.756,189.984 232.185,189.984 ; 228.756,203.954 232.185,203.954 ; 228.756,217.924 232.185,217.924 ; 232.82,47.744 235.995,47.744 236.376,47.363 237.793,45.946 237.793,44.569 ; 232.82,50.284 243.615,50.284 ; 232.82,61.714 235.995,61.714 236.376,61.333 237.793,59.916 237.793,58.539 ; 232.82,64.254 243.615,64.254 ; 232.82,75.684 235.995,75.684 236.376,75.303 237.793,73.886 237.793,72.509 ; 232.82,78.224 243.615,78.224 ; 232.82,89.654 235.995,89.654 236.376,89.273 237.793,87.856 237.793,86.479 ; 232.82,92.194 243.615,92.194 ; 232.82,103.624 235.995,103.624 236.376,103.243 237.793,101.826 237.793,100.449 ; 232.82,106.164 243.615,106.164 ; 232.82,117.594 235.995,117.594 236.376,117.213 237.793,115.796 237.793,114.419 ; 232.82,120.134 243.615,120.134 ; 232.82,131.564 235.995,131.564 236.376,131.183 237.793,129.766 237.793,128.389 ; 232.82,134.104 243.615,134.104 ; 232.82,145.534 235.995,145.534 236.376,145.153 237.793,143.736 237.793,142.359 ; 232.82,148.074 243.615,148.074 ; 232.82,159.504 235.995,159.504 236.376,159.123 237.793,157.706 237.793,156.329 ; 232.82,162.044 243.615,162.044 ; 232.82,173.474 235.995,173.474 236.376,173.093 237.793,171.676 237.793,170.299 ; 232.82,176.014 243.615,176.014 ; 232.82,187.444 235.995,187.444 236.376,187.063 237.793,185.646 237.793,184.269 ; 232.82,189.984 243.615,189.984 ; 232.82,201.414 235.995,201.414 236.376,201.033 237.793,199.616 237.793,198.239 ; 232.82,203.954 243.615,203.954 ; 232.82,215.384 235.995,215.384 236.376,215.003 237.793,213.586 237.793,212.209 ; 232.82,217.924 243.615,217.924 ; 241.563,44.569 241.563,42.811 242.726,41.648 257.077,41.648 ; 241.563,58.539 241.563,56.781 242.726,55.618 257.077,55.618 ; 241.563,72.509 241.563,70.751 242.726,69.588 257.077,69.588 ; 241.563,86.479 241.563,84.721 242.726,83.558 257.077,83.558 ; 241.563,100.449 241.563,98.691 242.726,97.528 257.077,97.528 ; 241.563,114.419 241.563,112.661 242.726,111.498 257.077,111.498 ; 241.563,128.389 241.563,126.631 242.726,125.468 257.077,125.468 ; 241.563,142.359 241.563,140.601 242.726,139.438 257.077,139.438 ; 241.563,156.329 241.563,154.571 242.726,153.408 257.077,153.408 ; 241.563,170.299 241.563,168.541 242.726,167.378 257.077,167.378 ; 241.563,184.269 241.563,182.511 242.726,181.348 257.077,181.348 ; 241.563,198.239 241.563,196.481 242.726,195.318 257.077,195.318 ; 241.563,212.209 241.563,210.451 242.726,209.288 257.077,209.288 ; 242.726,50.284 246.155,50.284 ; 242.726,64.254 246.155,64.254 ; 242.726,78.224 246.155,78.224 ; 242.726,92.194 246.155,92.194 ; 242.726,106.164 246.155,106.164 ; 242.726,120.134 246.155,120.134 ; 242.726,134.104 246.155,134.104 ; 242.726,148.074 246.155,148.074 ; 242.726,162.044 246.155,162.044 ; 242.726,176.014 246.155,176.014 ; 242.726,189.984 246.155,189.984 ; 242.726,203.954 246.155,203.954 ; 242.726,217.924 246.155,217.924 ; 246.79,47.744 249.965,47.744 250.346,47.363 251.763,45.946 251.763,44.569 ; 246.79,50.284 257.585,50.284 ; 246.79,61.714 249.965,61.714 250.346,61.333 251.763,59.916 251.763,58.539 ; 246.79,64.254 257.585,64.254 ; 246.79,75.684 249.965,75.684 250.346,75.303 251.763,73.886 251.763,72.509 ; 246.79,78.224 257.585,78.224 ; 246.79,89.654 249.965,89.654 250.346,89.273 251.763,87.856 251.763,86.479 ; 246.79,92.194 257.585,92.194 ; 246.79,103.624 249.965,103.624 250.346,103.243 251.763,101.826 251.763,100.449 ; 246.79,106.164 257.585,106.164 ; 246.79,117.594 249.965,117.594 250.346,117.213 251.763,115.796 251.763,114.419 ; 246.79,120.134 257.585,120.134 ; 246.79,131.564 249.965,131.564 250.346,131.183 251.763,129.766 251.763,128.389 ; 246.79,134.104 257.585,134.104 ; 246.79,145.534 249.965,145.534 250.346,145.153 251.763,143.736 251.763,142.359 ; 246.79,148.074 257.585,148.074 ; 246.79,159.504 249.965,159.504 250.346,159.123 251.763,157.706 251.763,156.329 ; 246.79,162.044 257.585,162.044 ; 246.79,173.474 249.965,173.474 250.346,173.093 251.763,171.676 251.763,170.299 ; 246.79,176.014 257.585,176.014 ; 246.79,187.444 249.965,187.444 250.346,187.063 251.763,185.646 251.763,184.269 ; 246.79,189.984 257.585,189.984 ; 246.79,201.414 249.965,201.414 250.346,201.033 251.763,199.616 251.763,198.239 ; 246.79,203.954 257.585,203.954 ; 246.79,215.384 249.965,215.384 250.346,215.003 251.763,213.586 251.763,212.209 ; 246.79,217.924 257.585,217.924 ; 255.533,44.569 255.533,42.811 256.696,41.648 271.047,41.648 ; 255.533,58.539 255.533,56.781 256.696,55.618 271.047,55.618 ; 255.533,72.509 255.533,70.751 256.696,69.588 271.047,69.588 ; 255.533,86.479 255.533,84.721 256.696,83.558 271.047,83.558 ; 255.533,100.449 255.533,98.691 256.696,97.528 271.047,97.528 ; 255.533,114.419 255.533,112.661 256.696,111.498 271.047,111.498 ; 255.533,128.389 255.533,126.631 256.696,125.468 271.047,125.468 ; 255.533,142.359 255.533,140.601 256.696,139.438 271.047,139.438 ; 255.533,156.329 255.533,154.571 256.696,153.408 271.047,153.408 ; 255.533,170.299 255.533,168.541 256.696,167.378 271.047,167.378 ; 255.533,184.269 255.533,182.511 256.696,181.348 271.047,181.348 ; 255.533,198.239 255.533,196.481 256.696,195.318 271.047,195.318 ; 255.533,212.209 255.533,210.451 256.696,209.288 271.047,209.288 ; 256.696,50.284 260.125,50.284 ; 256.696,64.254 260.125,64.254 ; 256.696,78.224 260.125,78.224 ; 256.696,92.194 260.125,92.194 ; 256.696,106.164 260.125,106.164 ; 256.696,120.134 260.125,120.134 ; 256.696,134.104 260.125,134.104 ; 256.696,148.074 260.125,148.074 ; 256.696,162.044 260.125,162.044 ; 256.696,176.014 260.125,176.014 ; 256.696,189.984 260.125,189.984 ; 256.696,203.954 260.125,203.954 ; 256.696,217.924 260.125,217.924 ; 260.76,47.744 263.935,47.744 264.316,47.363 265.733,45.946 265.733,44.569 ; 260.76,50.284 271.555,50.284 ; 260.76,61.714 263.935,61.714 264.316,61.333 265.733,59.916 265.733,58.539 ; 260.76,64.254 271.555,64.254 ; 260.76,75.684 263.935,75.684 264.316,75.303 265.733,73.886 265.733,72.509 ; 260.76,78.224 271.555,78.224 ; 260.76,89.654 263.935,89.654 264.316,89.273 265.733,87.856 265.733,86.479 ; 260.76,92.194 271.555,92.194 ; 260.76,103.624 263.935,103.624 264.316,103.243 265.733,101.826 265.733,100.449 ; 260.76,106.164 271.555,106.164 ; 260.76,117.594 263.935,117.594 264.316,117.213 265.733,115.796 265.733,114.419 ; 260.76,120.134 271.555,120.134 ; 260.76,131.564 263.935,131.564 264.316,131.183 265.733,129.766 265.733,128.389 ; 260.76,134.104 271.555,134.104 ; 260.76,145.534 263.935,145.534 264.316,145.153 265.733,143.736 265.733,142.359 ; 260.76,148.074 271.555,148.074 ; 260.76,159.504 263.935,159.504 264.316,159.123 265.733,157.706 265.733,156.329 ; 260.76,162.044 271.555,162.044 ; 260.76,173.474 263.935,173.474 264.316,173.093 265.733,171.676 265.733,170.299 ; 260.76,176.014 271.555,176.014 ; 260.76,187.444 263.935,187.444 264.316,187.063 265.733,185.646 265.733,184.269 ; 260.76,189.984 271.555,189.984 ; 260.76,201.414 263.935,201.414 264.316,201.033 265.733,199.616 265.733,198.239 ; 260.76,203.954 271.555,203.954 ; 260.76,215.384 263.935,215.384 264.316,215.003 265.733,213.586 265.733,212.209 ; 260.76,217.924 271.555,217.924 ; 269.503,44.569 269.503,42.811 270.666,41.648 285.017,41.648 ; 269.503,58.539 269.503,56.781 270.666,55.618 285.017,55.618 ; 269.503,72.509 269.503,70.751 270.666,69.588 285.017,69.588 ; 269.503,86.479 269.503,84.721 270.666,83.558 285.017,83.558 ; 269.503,100.449 269.503,98.691 270.666,97.528 285.017,97.528 ; 269.503,114.419 269.503,112.661 270.666,111.498 285.017,111.498 ; 269.503,128.389 269.503,126.631 270.666,125.468 285.017,125.468 ; 269.503,142.359 269.503,140.601 270.666,139.438 285.017,139.438 ; 269.503,156.329 269.503,154.571 270.666,153.408 285.017,153.408 ; 269.503,170.299 269.503,168.541 270.666,167.378 285.017,167.378 ; 269.503,184.269 269.503,182.511 270.666,181.348 285.017,181.348 ; 269.503,198.239 269.503,196.481 270.666,195.318 285.017,195.318 ; 269.503,212.209 269.503,210.451 270.666,209.288 285.017,209.288 ; 270.666,50.284 274.095,50.284 ; 270.666,64.254 274.095,64.254 ; 270.666,78.224 274.095,78.224 ; 270.666,92.194 274.095,92.194 ; 270.666,106.164 274.095,106.164 ; 270.666,120.134 274.095,120.134 ; 270.666,134.104 274.095,134.104 ; 270.666,148.074 274.095,148.074 ; 270.666,162.044 274.095,162.044 ; 270.666,176.014 274.095,176.014 ; 270.666,189.984 274.095,189.984 ; 270.666,203.954 274.095,203.954 ; 270.666,217.924 274.095,217.924 ; 274.73,47.744 277.905,47.744 278.286,47.363 279.703,45.946 279.703,44.569 ; 274.73,50.284 285.525,50.284 ; 274.73,61.714 277.905,61.714 278.286,61.333 279.703,59.916 279.703,58.539 ; 274.73,64.254 285.525,64.254 ; 274.73,75.684 277.905,75.684 278.286,75.303 279.703,73.886 279.703,72.509 ; 274.73,78.224 285.525,78.224 ; 274.73,89.654 277.905,89.654 278.286,89.273 279.703,87.856 279.703,86.479 ; 274.73,92.194 285.525,92.194 ; 274.73,103.624 277.905,103.624 278.286,103.243 279.703,101.826 279.703,100.449 ; 274.73,106.164 285.525,106.164 ; 274.73,117.594 277.905,117.594 278.286,117.213 279.703,115.796 279.703,114.419 ; 274.73,120.134 285.525,120.134 ; 274.73,131.564 277.905,131.564 278.286,131.183 279.703,129.766 279.703,128.389 ; 274.73,134.104 285.525,134.104 ; 274.73,145.534 277.905,145.534 278.286,145.153 279.703,143.736 279.703,142.359 ; 274.73,148.074 285.525,148.074 ; 274.73,159.504 277.905,159.504 278.286,159.123 279.703,157.706 279.703,156.329 ; 274.73,162.044 285.525,162.044 ; 274.73,173.474 277.905,173.474 278.286,173.093 279.703,171.676 279.703,170.299 ; 274.73,176.014 285.525,176.014 ; 274.73,187.444 277.905,187.444 278.286,187.063 279.703,185.646 279.703,184.269 ; 274.73,189.984 285.525,189.984 ; 274.73,201.414 277.905,201.414 278.286,201.033 279.703,199.616 279.703,198.239 ; 274.73,203.954 285.525,203.954 ; 274.73,215.384 277.905,215.384 278.286,215.003 279.703,213.586 279.703,212.209 ; 274.73,217.924 285.525,217.924 ; 283.473,44.569 283.473,42.811 284.636,41.648 298.987,41.648 ; 283.473,58.539 283.473,56.781 284.636,55.618 298.987,55.618 ; 283.473,72.509 283.473,70.751 284.636,69.588 298.987,69.588 ; 283.473,86.479 283.473,84.721 284.636,83.558 298.987,83.558 ; 283.473,100.449 283.473,98.691 284.636,97.528 298.987,97.528 ; 283.473,114.419 283.473,112.661 284.636,111.498 298.987,111.498 ; 283.473,128.389 283.473,126.631 284.636,125.468 298.987,125.468 ; 283.473,142.359 283.473,140.601 284.636,139.438 298.987,139.438 298.958,139.468 298.958,141.732 ; 283.473,156.329 283.473,154.571 284.636,153.408 v1(298.987,153.408) ; 283.473,170.299 283.473,168.541 284.636,167.378 298.987,167.378 ; 283.473,184.269 283.473,182.511 284.636,181.348 298.987,181.348 ; 283.473,198.239 283.473,196.481 284.636,195.318 298.987,195.318 ; 283.473,212.209 283.473,210.451 284.636,209.288 298.987,209.288 ; 284.636,50.284 288.065,50.284 ; 284.636,64.254 288.065,64.254 ; 284.636,78.224 288.065,78.224 ; 284.636,92.194 288.065,92.194 ; 284.636,106.164 288.065,106.164 ; 284.636,120.134 288.065,120.134 ; 284.636,134.104 288.065,134.104 ; 284.636,148.074 288.065,148.074 ; 284.636,162.044 288.065,162.044 ; 284.636,176.014 288.065,176.014 ; 284.636,189.984 288.065,189.984 ; 284.636,203.954 288.065,203.954 ; 284.636,217.924 288.065,217.924 ; 288.7,47.744 291.875,47.744 292.256,47.363 293.673,45.946 293.673,44.569 ; 288.7,50.284 299.495,50.284 ; 288.7,61.714 291.875,61.714 292.256,61.333 293.673,59.916 293.673,58.539 ; 288.7,64.254 299.495,64.254 ; 288.7,75.684 291.875,75.684 292.256,75.303 293.673,73.886 293.673,72.509 ; 288.7,78.224 299.495,78.224 ; 288.7,89.654 291.875,89.654 292.256,89.273 293.673,87.856 293.673,86.479 ; 288.7,92.194 299.495,92.194 ; 288.7,103.624 291.875,103.624 292.256,103.243 293.673,101.826 293.673,100.449 ; 288.7,106.164 299.495,106.164 ; 288.7,117.594 291.875,117.594 292.256,117.213 293.673,115.796 293.673,114.419 ; 288.7,120.134 299.495,120.134 ; 288.7,131.564 291.875,131.564 292.256,131.183 293.673,129.766 293.673,128.389 ; 288.7,134.104 299.495,134.104 ; 288.7,145.534 291.875,145.534 292.256,145.153 293.673,143.736 293.673,142.359 ; 288.7,148.074 v1@299.495,148.074 ; 288.7,159.504 291.875,159.504 292.256,159.123 293.673,157.706 293.673,156.329 ; 288.7,162.044 299.495,162.044 ; 288.7,173.474 291.875,173.474 292.256,173.093 293.673,171.676 293.673,170.299 ; 288.7,176.014 299.495,176.014 ; 288.7,187.444 291.875,187.444 292.256,187.063 293.673,185.646 293.673,184.269 ; 288.7,189.984 299.495,189.984 ; 288.7,201.414 291.875,201.414 292.256,201.033 293.673,199.616 293.673,198.239 ; 288.7,203.954 299.495,203.954 ; 288.7,215.384 291.875,215.384 292.256,215.003 293.673,213.586 293.673,212.209
  Bottom Layer w0.8: 288.7,217.924 299.495,217.924 ; 298.606,50.284 302.035,50.284 302.035,217.924 298.606,217.924 ; 298.606,64.254 302.035,64.254 ; 298.606,78.224 302.035,78.224 ; 298.606,92.194 302.035,92.194 ; 298.606,106.164 302.035,106.164 ; 298.606,120.134 302.035,120.134 ; 298.606,134.104 302.035,134.104 ; v1@298.606,148.074 302.035,148.074 ; 298.606,162.044 302.035,162.044 ; 298.606,176.014 302.035,176.014 ; 298.606,189.984 302.035,189.984 ; 298.606,203.954 302.035,203.954
  other v1: 298.987,147.955

## Keep-outs
Keep-Out Layer:
  the board outline again, w0.508

## Silkscreen, mask and mechanical layers (free items; w line width, h text height)
Bottom Overlay:
  text "GND" at 299.951,154.963 h0.7
  text "+5V" at 299.951,149.502 h0.7